# Altium PCB PCB3.PcbDoc
Units mm, origin at the board's own origin, x right, y up, seen from the top; angles counter-clockwise.
Board outline 152.4 x 101.6 mm, 2 copper layers (Top Layer, Bottom Layer); 24 components, 24 nets, 136 pads, 0 vias.
Unrouted connection lines stored in the file: 3.
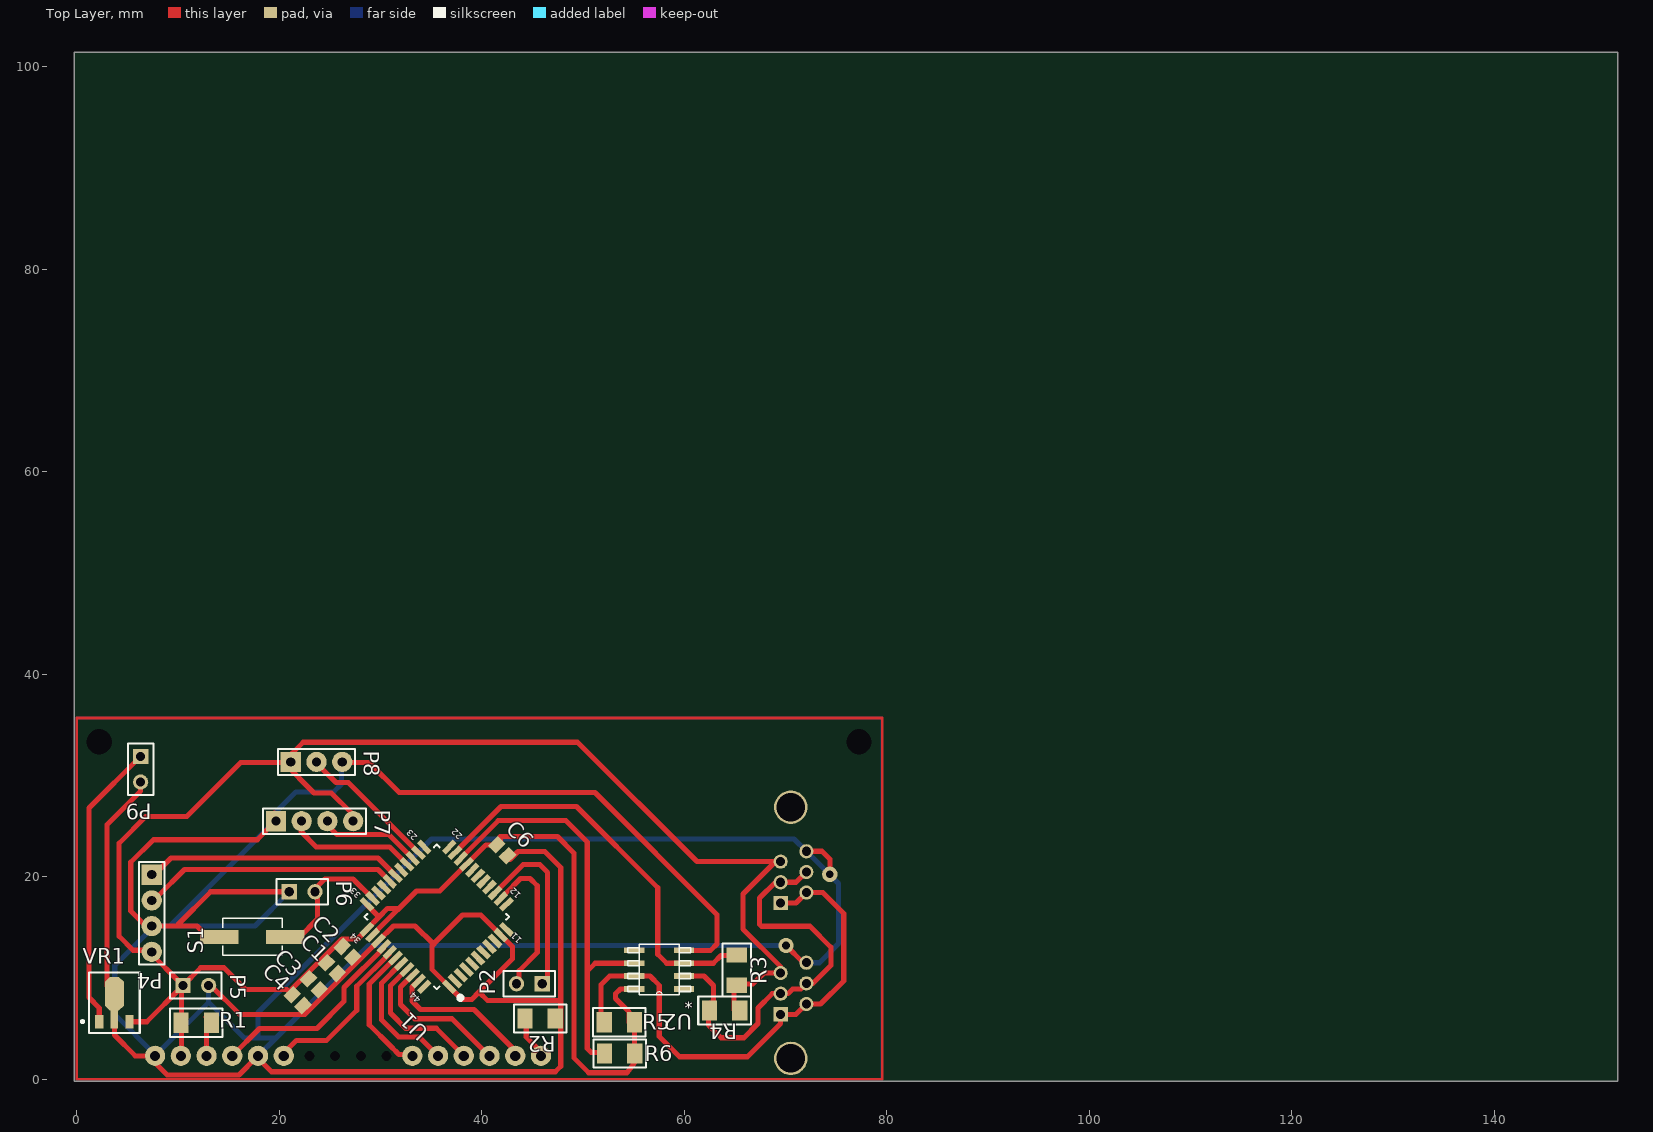
[diagram p0: Top Layer view]
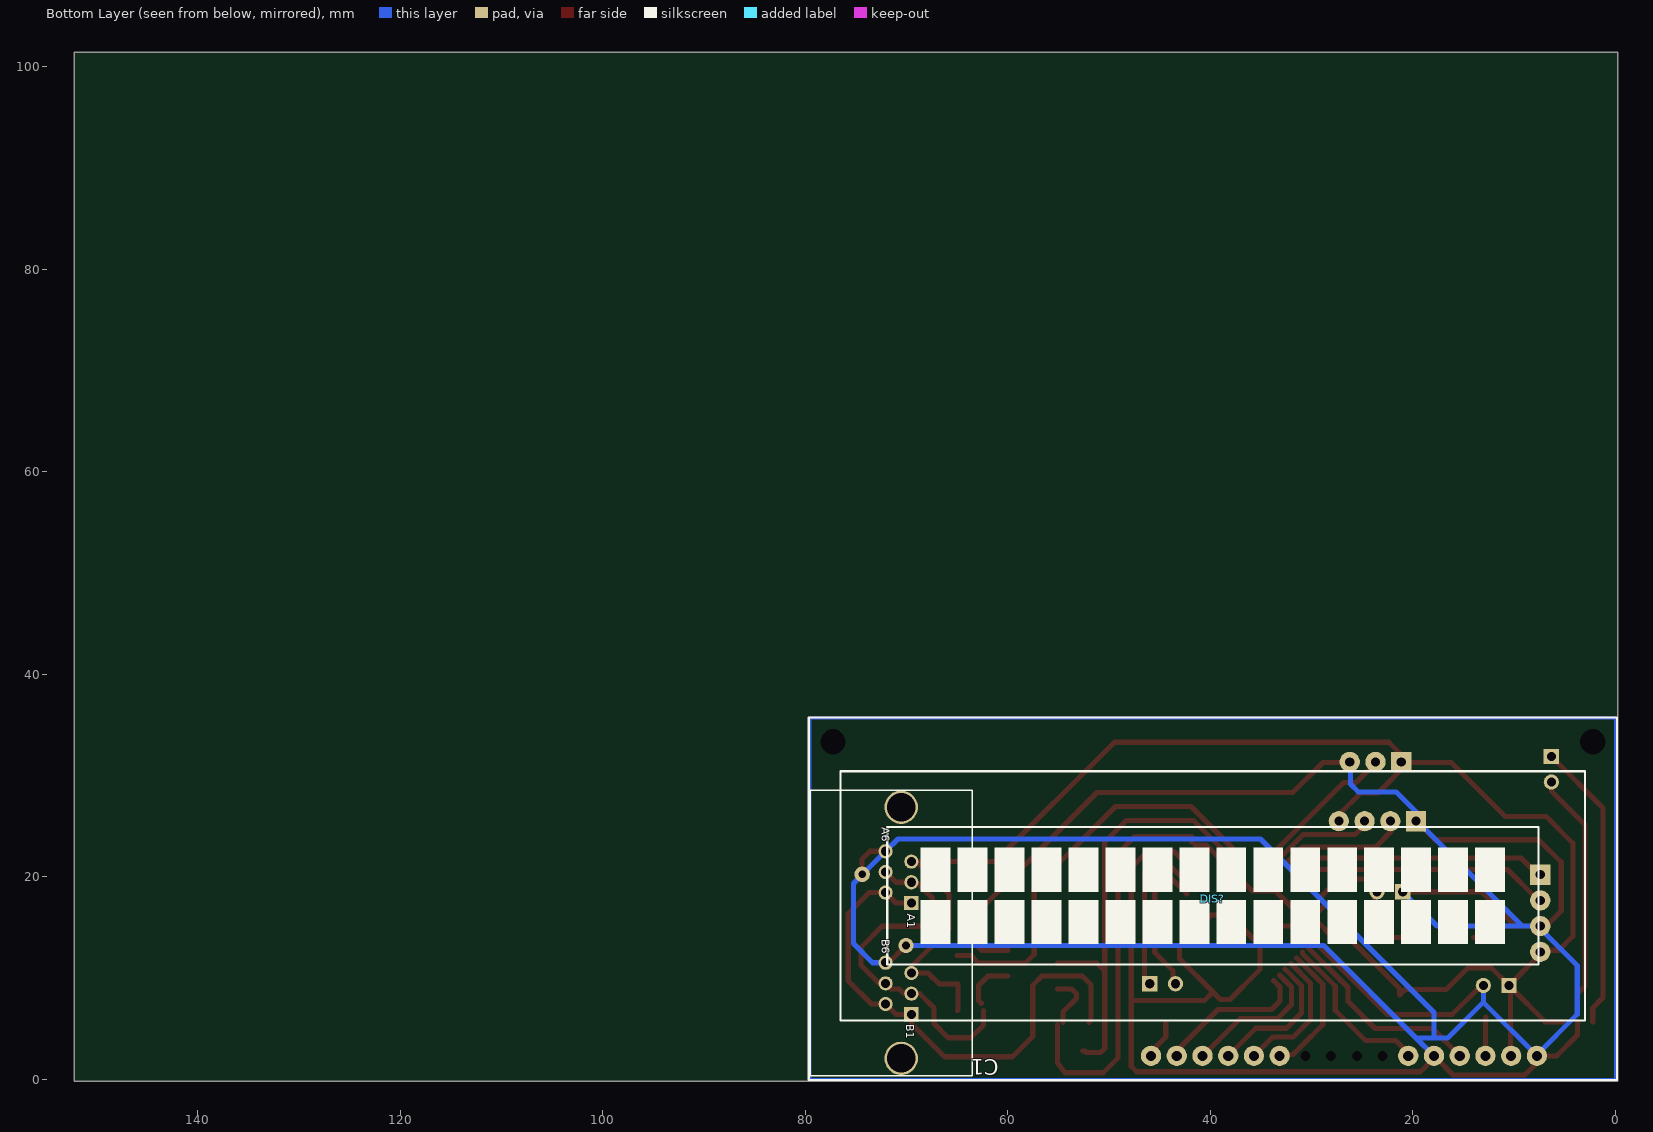
[diagram p1: Bottom Layer view, seen from below]

## Layer stack, top to bottom
Top Solder: solder mask 0.0102, Solder Resist, Dk 3.5
Top Layer: signal copper 0.0356
Dielectric 1: dielectric 0.32, FR-4, Dk 4.8
Bottom Layer: signal copper 0.0356
Bottom Solder: solder mask 0.0102, Solder Resist, Dk 3.5

## Board outline
-0.229,-0.178 152.171,-0.178 152.171,101.422 -0.229,101.422

## Design rules (kind name [scope] priority, off if disabled: settings)
Clearance [All] p1: gap=0.203
PolygonConnect [All] p1: connectstyle=Relief reliefconductorwidth=0.254 reliefentries=4 polygonreliefangle="90 Angle" airgapwidth=0.254
RoutingVias [All] p1: holewidth=0.711 width=1.27 viastyle="Through Hole" minholewidth=0.711 minwidth=1.27 maxholewidth=0.711 maxwidth=1.27
SolderMaskExpansion [All] p1: expansion=0.102
Width [All] p1: maxlimit=0.762 minlimit=0.254 preferedwidth=0.508 minimp=50.000000 maximp=50.000000 favimp=50.000000
30 further rules are at their usual default settings.

## Components (designator, comment, footprint, x,y, rotation, side; value= is the part's Value field where it differs from the comment)
C1 "WE-Modular Jack 615012149421" 615012149421 70.79,14.478 r270 bottom locked
C1 "Cap Pol3" C0805 25.197,10.998 r315 top
C2 "Cap Pol3" C0805 26.746,12.598 r315 top
C3 "Cap Pol3" C0805 23.419,9.398 r315 top
C4 "Cap Pol3" C0805 21.819,7.823 r315 top
C6 "Cap Pol3" C0805 42.012,22.631 r315 top
DIS? "Tuxgraphics LCD display 16x2 characters reflective, without background light   Source: tuxgr_12x2_r2.pdf" TUXGR_16X2_R2 39.751,17.831 r0 bottom locked
P2 "PRG" HDR1X2 45.974,9.449 r180 top
P4 "UART" HDR1X4 7.417,20.218 r270 top
P5 "FT" HDR1X2 10.5,9.279 r0 top
P6 "PRG2" HDR1X2 21,18.529 r0 top
P7 "HC" HDR1X4 19.685,25.502 r0 top
P8 "LM" HDR1X3 21.15,31.35 r0 top
P9 "VIN" HDR1X2 6.325,31.902 r270 top
R1 "Res Varistor" R1206-0.55 11.811,5.588 r180 top
R2 "Res Varistor" R1206-0.55 45.771,6.02 r180 top
R3 "Res Varistor" R1206-0.55 65.175,10.8 r270 top
R4 "Res Varistor" R1206-0.55 63.983,6.807 r0 top
R5 "Res Varistor" R1206-0.55 53.594,5.639 r0 top
R6 "Res Varistor" R1206-0.55 53.619,2.565 r0 top
S1 "434111025826" 4341x10258xx 17.35,14.079 r180 top
U1 "CY8C4245AXI-483" TQFP80P1200X1200X160-44N 35.56,16.053 r135 top locked
U2 "P82B715_D_8" D8 57.525,10.842 r180 top
VR1 "Volt Reg" SOT89/X.8 3.734,7.087 r0 top

## Footprints (in the part's own frame and the unit in brackets; to place one, negate y for a bottom-side part, rotate by r counter-clockwise, add the part's x,y. Pads: shape width x height; smd on the part's side, far side on the other; paste and mask are expansions set on the pad)
4341x10258xx [mm] "6.0*3.8mm vertical type, SMD,  height 2.5mm, white actuator, 260gf, T&R"
  rect 3.794x1.4 smd: 1(-3.25,0) 2(3.25,0)
  silkscreen extent -2.94,-1.84 2.94,1.84, body extent -3.65,-1.95 3.65,1.95, height 2.51
615012149421 [mm] "WR-MJ_Modular Jack_Tab UP_6P6C  Pre-Assembly 1x2"
  rect 1.4x1.4 hole 0.9: A1(-2.95,1.27) B1(8.05,1.27)
  round 1.4 hole 0.9: A2(-3.97,-1.27) A3(-4.99,1.27) A4(-6.01,-1.27) A5(-7.03,1.27) A6(-8.05,-1.27) B2(7.03,-1.27) B3(6.01,1.27) B4(4.99,-1.27) B5(3.97,1.27) B6(2.95,-1.27)
  round 3.3 hole 2.8: Z1(-12.4,0.27) Z2(12.4,0.27)
  round 2.8 smd: ""(-12.4,0.27)
  silkscreen extent -14.1,-8.7 14.1,7.3, body extent -14.1,-8.7 14.01,7.3, height 15.41
C0805 [mm] "Chip Capacitor, Body 2.0x1.3mm, IPC High Density"
  rect 1.1x1.4 smd: 1(-0.75,0) 2(0.75,0)
  body extent -1.1,-0.72 1.1,0.72, height 1.4
D8 [mil]
  rect 78x22 smd: 1(-97,75) 2(-97,25) 3(-97,-25) 4(-97,-75) 5(97,-75) 6(97,-25) 7(97,25) 8(97,75)
  silkscreen extent -122,-98 122,99
HDR1X2 [mm] "Connector; Header; 2 Position"
  rect 1.5x1.5 hole 0.9: 1(0,0)
  round 1.5 hole 0.9: 2(2.54,0)
  silkscreen extent -1.27,-1.27 3.81,1.27
HDR1X3 [mm] "Connector; Header; 3 Position"
  rect 2x2 hole 0.9: 1(0,0)
  round 2 hole 0.9: 2(2.54,0) 3(5.08,0)
  silkscreen extent -1.27,-1.27 6.35,1.27
HDR1X4 [mm] "Connector; Header; 4 Position"
  rect 2x2 hole 0.9: 1(0,0)
  round 2 hole 0.9: 2(2.54,0) 3(5.08,0) 4(7.62,0)
  silkscreen extent -1.27,-1.27 8.89,1.27
R1206-0.55 [mm] "Resistor Chip 1206 Height 0.55mm"
  rect 1.5x2 smd: 1(-1.5,0) 2(1.5,0)
  silkscreen extent -2.6,-1.4 2.6,1.4, body extent -1.6,-0.8 1.6,0.8, height 0.56
SOT89/X.8 [mm] "SOT-89; Body 4.6 x 4.25 mm, inc. leads (LxW max)"
  oct 1.85x3.3 smd: 0(0,1.388)
  rect 0.8x1.35 smd: 1(-1.5,-1.387) 3(1.5,-1.387)
  rect 0.75x1.8 smd: 2(0,-1.162)
  silkscreen extent -3.27,-2.51 2.5,3.49
TQFP80P1200X1200X160-44N [mm]
  rect 1.55x0.55 smd mask+0: 1(-5.75,4) 2(-5.75,3.2) 3(-5.75,2.4) 4(-5.75,1.6) 5(-5.75,0.8) 6(-5.75,0) 7(-5.75,-0.8) 8(-5.75,-1.6) 9(-5.75,-2.4) 10(-5.75,-3.2) 11(-5.75,-4) 23(5.75,-4) 24(5.75,-3.2) 25(5.75,-2.4) 26(5.75,-1.6) 27(5.75,-0.8) 28(5.75,0) 29(5.75,0.8) 30(5.75,1.6) 31(5.75,2.4) 32(5.75,3.2) 33(5.75,4)
  rect 0.55x1.55 smd mask+0: 12(-4,-5.75) 13(-3.2,-5.75) 14(-2.4,-5.75) 15(-1.6,-5.75) 16(-0.8,-5.75) 17(0,-5.75) 18(0.8,-5.75) 19(1.6,-5.75) 20(2.4,-5.75) 21(3.2,-5.75) 22(4,-5.75) 34(4,5.75) 35(3.2,5.75) 36(2.4,5.75) 37(1.6,5.75) 38(0.8,5.75) 39(0,5.75) 40(-0.8,5.75) 41(-1.6,5.75) 42(-2.4,5.75) 43(-3.2,5.75) 44(-4,5.75)
  silkscreen extent -7.5,-5.05 5.05,5.05, body extent -5.05,-5.05 5.05,5.05, height 1.6
TUXGR_16X2_R2 [mm]
  round 0 hole 2.5: 1(-37.5,-15.5) 1(37.5,-15.5)
  round 0 on Mech13: 1(-37.5,15.5)
  round 2 hole 1: 1(-32,15.5) 2(-29.46,15.5) 3(-26.92,15.5) 4(-24.38,15.5) 5(-21.84,15.5) 6(-19.3,15.5) 11(-6.6,15.5) 12(-4.06,15.5) 13(-1.52,15.5) 14(1.02,15.5) 15(3.56,15.5) 16(6.1,15.5)
  round 0 on Mech16: 1(37.5,15.5)
  round 0 hole 1: 7(-16.76,15.5) 8(-14.22,15.5) 9(-11.68,15.5) 10(-9.14,15.5)
  silkscreen extent -39.9,-17.9 39.9,17.9

## Part data
C1: "WR-MJ_Modular Jack_Tab UP_6P6C"
C1 C2 C3 C4 C6: "Polarized Capacitor (Surface Mount)"
DIS?: library part TUXGR_16X2_R2
P2 P5 P6 P9: library part "Header 2", "Header, 2-Pin"
P4 P7: library part "Header 4", "Header, 4-Pin"
P8: library part "Header 3", "Header, 3-Pin"
R1 R2 R3 R4 R5 R6: "Varistor (Voltage-Sensitive Resistor)"
S1: library part "WS-TASV, 434111025826", "WS-TASV 6.0x3.8 mm SMD"
VR1: "Voltage Regulator"

## Free pads (board coordinates)
  round 1.524 hole 0.762: 2(70.05,13.225) 3(74.375,20.25)

## Nets (pads, with @x,y where several pads share a name; then routed paths per layer and width w, separated by ;. In a path a pad name is that pad's centre, name@x,y a point inside that pad or via, vN(x,y) a via of type N, cw(c..) or ccw(c..) an arc to the next point about the centre after c; other vN are vias at no path point)
D4: DIS?.11 U1.39 | length 13.1
  Top Layer w0.508: U1.39@31.476,12.005 28.9,9.43 28.9,5.39 31.002,3.288 31.008,3.288 31.568,2.727 31.568,2.722 31.821,2.469 DIS?.11@33.151,2.469
D5: DIS?.12 U1.40 | length 13.4
  Top Layer w0.508: U1.40@32.041,11.44 30.099,9.497 30.099,5.893 31.801,4.191 33.831,4.191 DIS?.12
D6: DIS?.13 U1.41 | length 14
  Top Layer w0.508: U1.41@32.607,10.874 30.988,9.255 30.988,6.553 32.487,5.055 35.509,5.055 DIS?.13
D7: DIS?.14 U1.42 | length 14.3
  Top Layer w0.508: U1.42@33.173,10.308 31.979,9.114 31.979,7.391 33.376,5.994 37.059,5.994 DIS?.14@40.747,2.306
E: DIS?.6 U1.38 | length 16.2
  Top Layer w0.508: DIS?.6@20.33,2.469 21.721,3.861 24.689,3.861 27.661,6.833 27.661,9.196 30.91,12.445 U1.38@30.91,12.571
ECHO: P7.2 U1.26 | length 13.4
  Top Layer w0.508: P7.2@22.15,26.079 22.15,24.479 23.667,22.962 30.912,22.962 U1.26@32.606,21.267
GND: C1.2 C1.A6 C1.B6 C2.2 C3.2 C4.2 C6.2 DIS?.1@7.751,2.331 DIS?.5 P4.3 P5.2 P6.1 P7.1 P8.3 P9.2 pad.2 pad.3 R2.1 S1.2 U1.1 U1.10 U1.36 U2.4 VR1.0 VR1.2 | length 927
  Top Layer w0.254: 0,0 79.553,0 79.553,35.687 0,35.687 0,0
  Top Layer w0.508: VR1.2@3.734,5.699 3.734,4.394 5.797,2.331 7.751,2.331 7.751,1.647 8.948,0.45 16.03,0.45 17.79,2.209 19.237,0.762 47.269,0.762 47.803,1.295 47.803,7.779 ; VR1.0 2.997,9.211 2.997,25.146 6.325,28.473 P9.2 ; 10.011,15.291 13.25,18.529 P6.1 ; P5.2@13.3,9.279 13.3,9.229 16.103,6.426 22.539,6.426 U1.36 31.277,15.164 33.426,15.164 35.23,13.36 ; S1.2@14.025,14.029 13,14.029 11.89,15.138 P4.3 7.127,14.848 5.35,16.625 5.35,21.438 7.584,23.673 17.831,23.673 19.55,25.392 P7.1@19.55,26.279 ; P8.3@26.162,31.293 28.88,31.293 31.852,28.321 51.181,28.321 63.246,16.256 63.246,13.386 62.608,12.748 59.989,12.748 U2.4 ; 35.281,13.31 35.23,13.36 ; U1.1@36.775,9.173 38.049,7.899 39.014,7.899 39.743,8.628 ; U1.1 35.077,10.879 35.077,13.208 35.23,13.36 ; C6.2@42.799,21.717 43.586,22.504 46.228,22.504 47.803,20.93 47.803,7.779 ; pad.2 71.747,11.528 C1.B6 ; C1.A6 73.597,22.528 74.363,21.762 74.375,21.775 pad.3 ; 35.23,13.36 38.1,16.231 39.903,16.231 43.028,13.106 43.028,11.913 39.743,8.628 ; 39.743,8.628 40.591,7.779 47.803,7.779
  Bottom Layer w0.254: 0,0 79.502,0 79.502,35.687 0,35.687 0,0
  Bottom Layer w0.508: DIS?.1@7.751,2.331 DIS?.1@7.803,2.383 ; P5.2 13.04,7.619 ; DIS?.5 19.678,4.097 ; P7.1@19.35,26.079 19.35,25.293 9.195,15.138 ; P7.1@19.55,26.279 21.668,28.397 25.4,28.397 26.162,29.159 P8.3@26.162,30.378 ; P6.1 17.609,15.138 9.195,15.138 ; pad.2 28.805,13.225 19.678,4.097 ; C1.B6 73.352,11.528 75.235,13.411 75.235,19.353 pad.3@74.387,20.201 ; pad.3 pad.3@74.387,20.201 ; DIS?.1@7.803,2.383 3.759,6.426 3.759,11.244 7.417,14.902 P4.3 9.195,15.138 ; DIS?.1@7.803,2.383 13.04,7.619 ; 13.04,7.619 16.562,4.097 17.911,4.097 ; 17.911,4.097 19.678,4.097 ; 17.911,4.097 17.911,6.608 35.052,23.749 70.839,23.749 C1.A6 pad.3@74.387,20.201
LCL: C1.A1 C1.A2 C1.B1 C1.B2 R5.1 U2.7 | length 52.2
  Top Layer w0.508: R5.1@51.991,5.636 51.791,5.836 51.791,9.358 52.64,10.207 U2.7 56.61,10.207 57.525,9.292 57.525,4.248 59.538,2.235 66.241,2.235 69.52,5.514 C1.B1 71.04,6.428 C1.B2 73.463,7.448 75.743,9.728 75.743,16.383 73.678,18.448 C1.A2 71.04,17.428 C1.A1
LDA: C1.A3 C1.A4 C1.B3 C1.B4 R4.1 U2.2 | length 41.1
  Top Layer w0.508: U2.2 61.954,10.207 62.89,9.271 62.89,7.798 R4.1@62.611,7.518 ; R4.1@62.408,6.807 62.408,5.359 63.652,4.115 65.888,4.115 67.285,5.512 67.285,7.061 68.692,8.468 C1.B3 70.241,8.468 70.714,8.941 71.513,8.941 C1.B4 72.709,9.488 74.473,11.252 74.473,13.056 72.403,15.125 67.628,15.125 67.437,15.316 67.437,17.907 68.998,19.468 C1.A3 71.04,19.468 C1.A4
LED: DIS?.15 U1.43 | length 14.9
  Top Layer w0.508: U1.43@33.738,9.743 33.123,9.127 33.123,7.746 33.96,6.909 39.243,6.909 43.133,3.019 DIS?.15@43.133,2.331
NetDIS?_3: DIS?.3 R1.1 | length 3.8
  Top Layer w0.508: DIS?.3@12.755,2.407 12.827,2.479 12.827,6.121 R1.1@12.784,6.164
NetDIS?_16: DIS?.16 R2.2 | length 3.9
  Top Layer w0.508: R2.2@44.399,5.563 44.399,4.191 45.673,2.917 DIS?.16@45.673,2.204
NetP9_1: P9.1 VR1.1 | length 28.7
  Top Layer w0.508: VR1.1 2.234,7.063 1.219,8.077 1.219,26.797 P9.1
OUT: P8.2 U1.24 | length 13
  Top Layer w0.508: P8.2@24.162,30.752 25.603,29.312 26.822,29.312 U1.24@33.736,22.398
RS: DIS?.4 U1.37 | length 20.3
  Top Layer w0.508: DIS?.4 18.07,5.029 23.724,5.029 26.416,7.722 26.416,9.083 30.344,13.011 U1.37@30.344,13.137
RX: P4.1 U1.28 | length 24.5
  Top Layer w0.508: P4.1@8.188,20.717 9.325,21.854 29.759,21.854 U1.28@31.476,20.137
SCL: R6.1 U1.20 U2.6 | length 42.1
  Top Layer w0.508: U1.20@38.368,22.292 41.629,25.552 48.311,25.552 50.419,23.444 50.419,10.686 ; R6.1@52.629,2.819 52.375,2.819 52.222,2.667 50.814,2.667 50.419,3.062 50.419,10.686 ; U2.6 51.21,11.477 50.419,10.686
SDA: R3.1 U1.21 U2.3 | length 39.5
  Top Layer w0.508: U1.21@37.803,22.858 41.894,26.949 49.352,26.949 57.379,18.923 57.379,12.363 58.265,11.477 U2.3 62.861,11.477 63.627,12.243 R3.1@64.999,12.243
SWDCLK: P2.1 U1.14 | length 16.7
  Top Layer w0.508: U1.14@41.775,18.909 44.074,21.209 45.745,21.209 46.512,20.443 46.512,9.779 P2.1@46.5,9.779
SWDIO: P2.2 U1.13 | length 14.2
  Top Layer w0.508: U1.13@42.328,18.332 43.833,19.837 44.78,19.837 45.491,19.126 45.491,12.522 43.7,10.73 P2.2@43.7,9.779
TRIG: P7.3 U1.25 | length 10.7
  Top Layer w0.508: P7.3@24.85,26.079 24.85,25.036 25.695,24.19 30.826,24.19 U1.25@33.178,21.839
TX: P4.2 U1.29 | length 24.5
  Top Layer w0.508: P4.2@8.011,18.095 10.645,20.729 29.766,20.729 U1.29@30.917,19.578
VCC: C1.1 C1.A5 C1.B5 C2.1 C3.1 C4.1 C6.1 DIS?.2 P4.4 P5.1 P7.4 P8.1 R1.2 R3.2 R4.2 R5.2 R6.2 U1.19 U1.33 U1.34 U1.35 U2.8 VR1.3 | length 224.8
  Top Layer w0.508: VR1.3 6.92,5.699 P5.1@10.35,9.129 ; DIS?.2@10.291,2.548 10.35,2.606 P5.1@10.35,9.129 ; P8.1@21.082,31.293 16.205,31.293 10.871,25.959 6.833,25.959 4.2,23.326 4.2,14.129 5.574,12.755 7.024,12.755 P5.1 ; P7.4@27.17,26.279 27.162,26.279 25.146,28.296 23.454,28.296 20.413,31.337 22.374,33.299 49.454,33.299 61.245,21.508 C1.A5@69.006,21.508 ; U1.33@28.618,17.28 29.845,16.053 30.683,16.891 31.836,16.891 ; U1.34@28.647,14.834 29.856,16.042 ; U1.34 27.728,13.877 26.196,13.877 21.288,8.969 C4.1 20.777,8.865 16.73,8.865 14.566,11.029 12.25,11.029 P5.1 ; U1.35@29.671,14.726 33.563,18.618 35.865,18.618 40.408,23.162 C6.1 ; C6.1@41.83,23.442 41.83,23.978 47.473,23.978 49.098,22.352 49.098,2.134 50.571,0.66 54.349,0.66 55.104,1.665 R5.2@55.104,5.433 ; R5.2@54.559,5.636 54.559,6.655 53.213,8.001 53.213,8.455 53.695,8.937 U2.8 ; R4.2@64.959,6.807 64.922,6.844 64.922,9.412 66.766,9.412 67.861,10.508 C1.B5@68.943,10.508 ; C1.B5 69.52,11.13 65.811,14.839 65.811,18.313 C1.A5@69.006,21.508 ; C1.A5 C1.A5@69.006,21.508 ; P5.1@10.35,9.129 P5.1
XRES: P6.2 S1.1 U1.32 | length 14.8
  Top Layer w0.508: S1.1@19.5,14.029 22,14.029 23.8,15.829 23.8,18.529 23.8,19.079 24.512,19.791 27.296,19.791 U1.32
pads on no net: C1. C1.Z1 C1.Z2 DIS?.1@2.251,2.331 DIS?.1@2.251,33.331 DIS?.1@77.251,2.331 DIS?.1@77.251,33.331 DIS?.7 DIS?.8 DIS?.9 DIS?.10 U1.2 U1.3 U1.4 U1.5 U1.6 U1.7 U1.8 U1.9 U1.11 U1.12 U1.15 U1.16 U1.17 U1.18 U1.22 U1.23 U1.27 U1.30 U1.31 U1.44 U2.1 U2.5

## Text inside footprints (layer, text, board x,y; h text height)
C1: Bottom Overlay "A1" at 69.901,16.383 h0.8 r90; Bottom Overlay "A6" at 72.441,24.892 h0.8 r90; Bottom Overlay "B1" at 70.028,5.461 h0.8 r90; Bottom Overlay "B6" at 72.441,13.843 h0.8 r90
U1: Top Overlay "11" at 44.045,13.79 h0.65 r135; Top Overlay "12" at 43.975,18.245 h0.65 r135; Top Overlay "22" at 38.176,24.043 h0.65 r135; Top Overlay "23" at 33.722,23.972 h0.65 r135; Top Overlay "33" at 28.135,18.245 h0.65 r135; Top Overlay "34" at 28.135,13.719 h0.65 r135; Top Overlay "44" at 34.075,7.921 h0.65 r135
U2: Top Overlay "*" at 60.827,8.505 h1.97 r180; Mechanical 16 "*" at 60.827,8.505 h1.97 r180